# Altium PCB blackfin_pcb.PcbDoc (part 2 of 4)
Units mil, origin at the board's own origin, x right, y up, seen from the top; angles counter-clockwise.
Board outline 4330.71 x 5905.51 mil, 4 copper layers (Top Layer, GROUND, POWER, Bottom Layer), stack 59.76 mil thick; 381 components, 314 nets, 1218 pads, 647 vias.
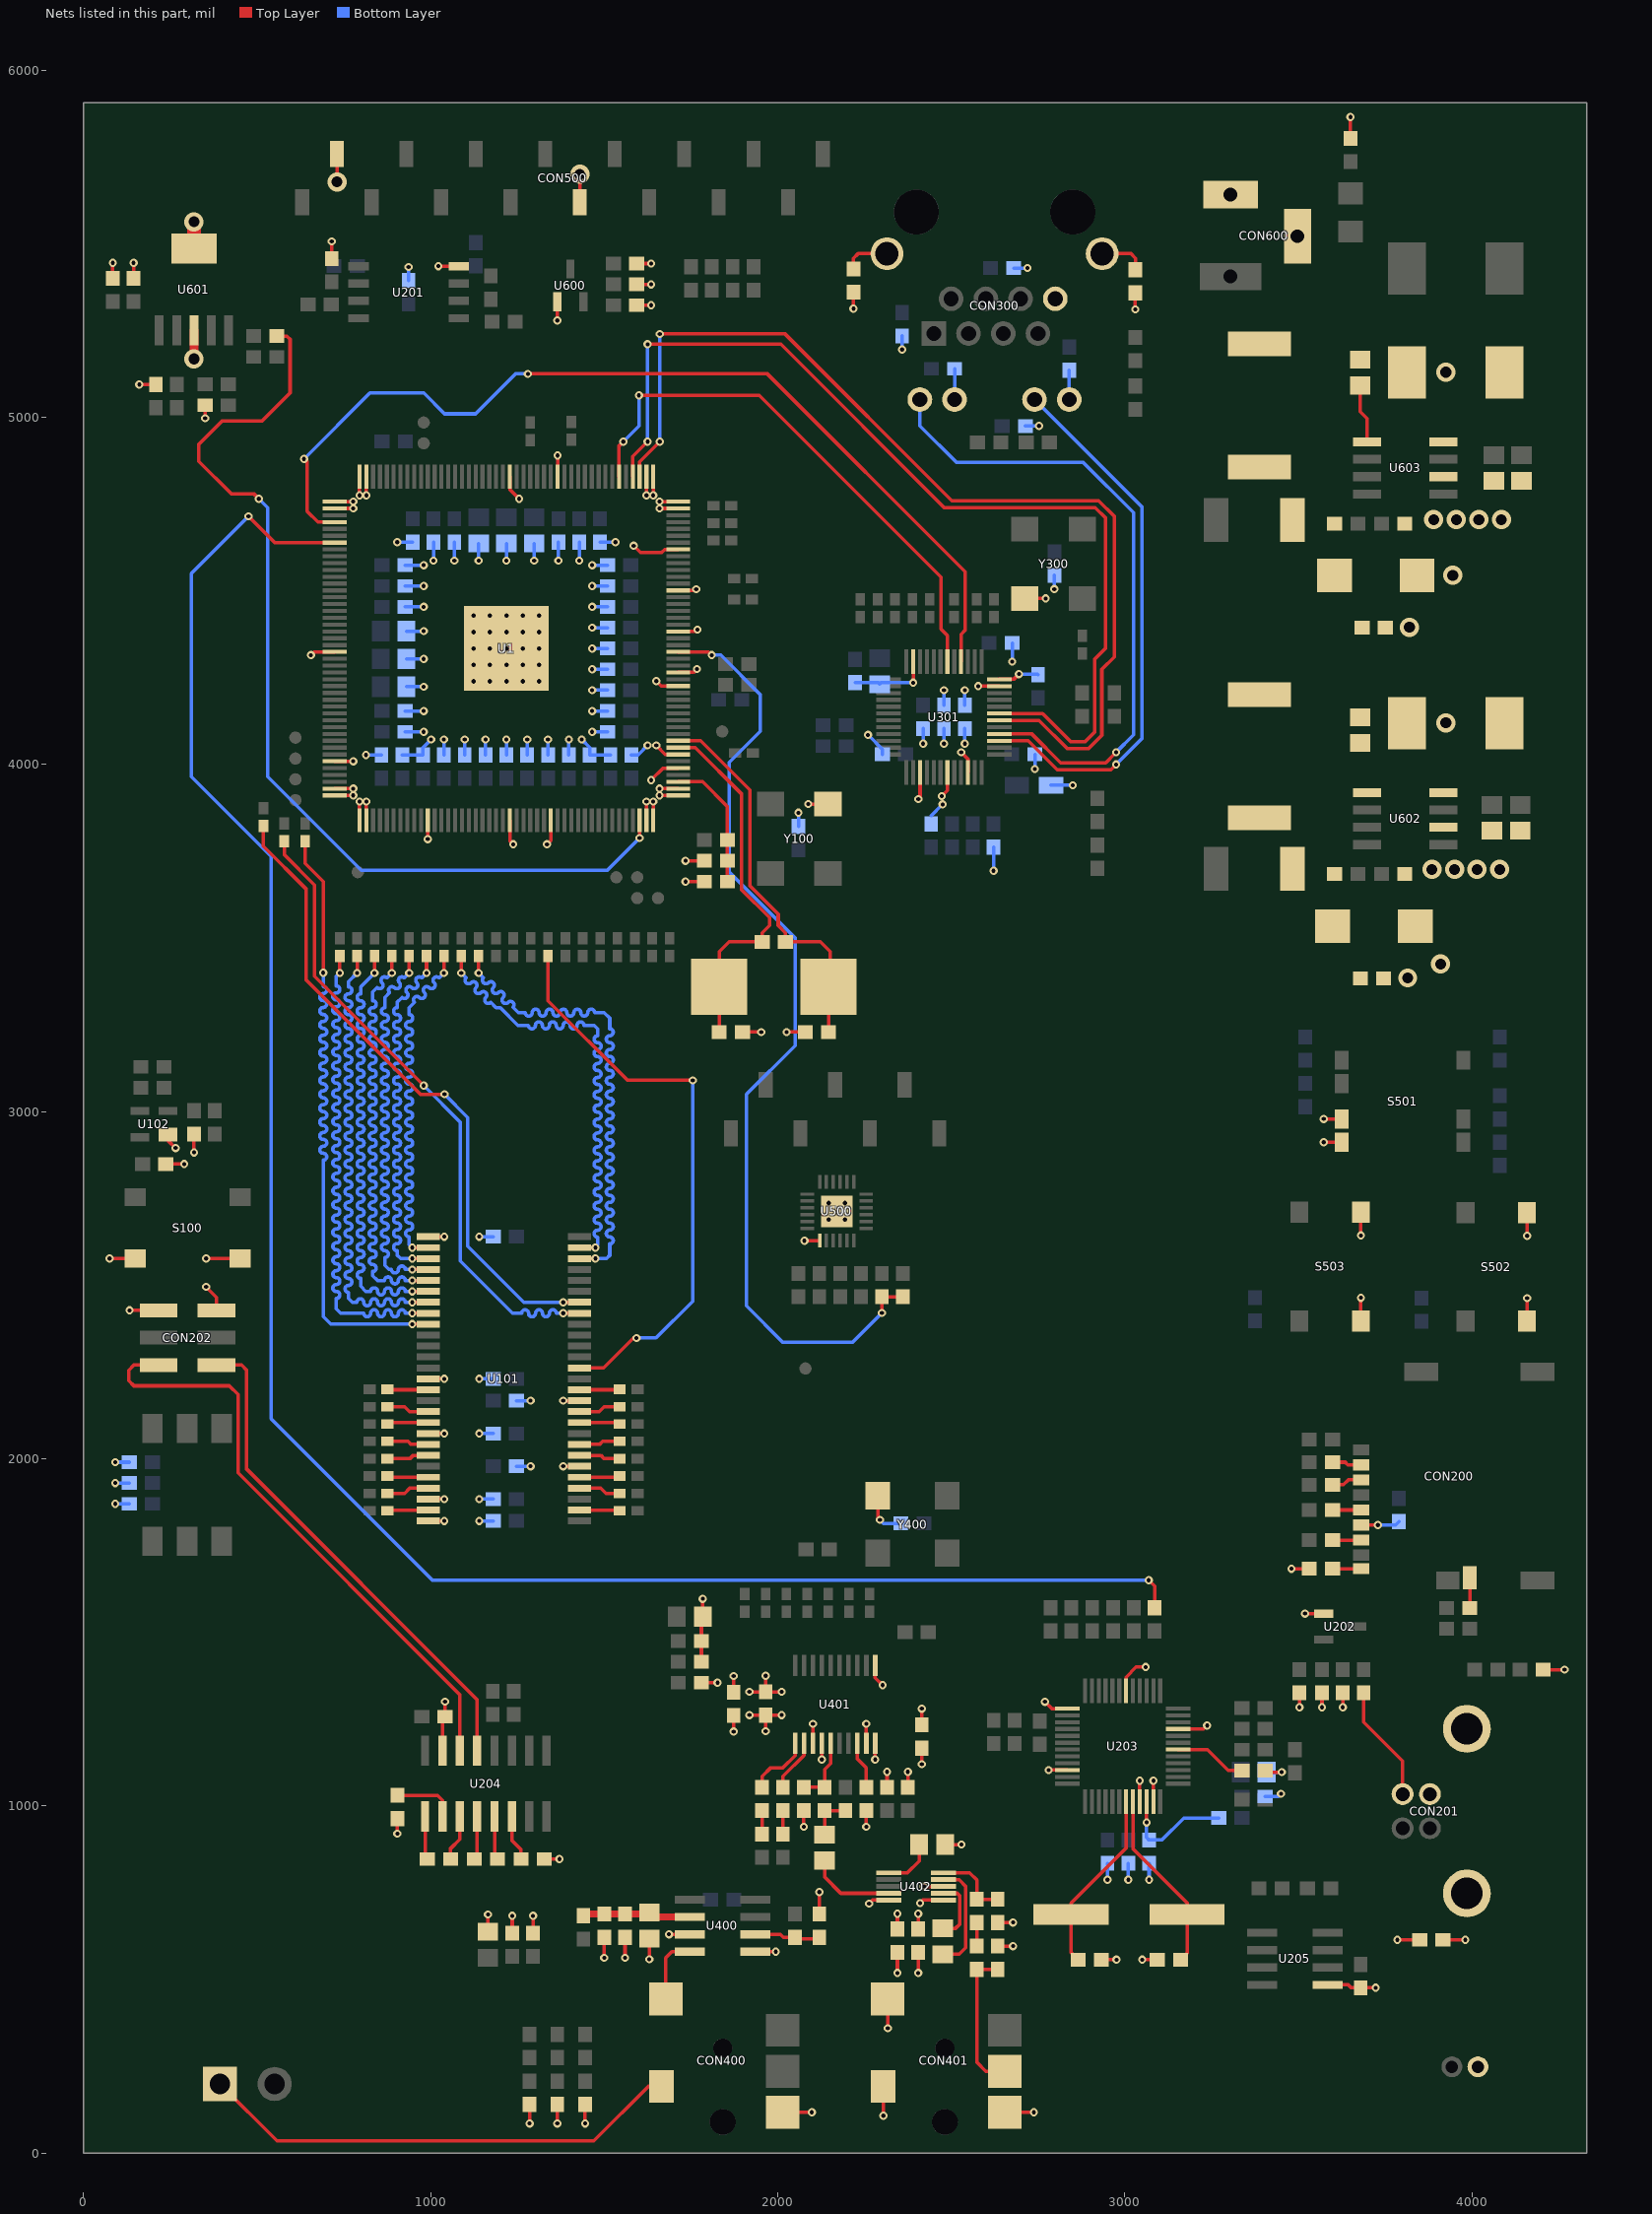
[diagram p4: the nets of this part, all layers, seen from the top]

## Via types
v1: diameter 23.62, hole 11.81, Top Layer to Bottom Layer, tented both sides, 566 vias
v2: diameter 55.12, hole 31.5, Top Layer to Bottom Layer, 36 vias
v3: diameter 25.98, hole 12.99, Top Layer to Bottom Layer, tented top, 29 vias
v4: diameter 157.48, hole 98.43, Top Layer to Bottom Layer, 8 vias
v5: diameter 55.12, hole 31.5, Top Layer to Bottom Layer, tented both sides, 4 vias
v6: diameter 137.8, hole 90.55, Top Layer to Bottom Layer, 4 vias

## Nets (pads, with @x,y where several pads share a name; then routed paths per layer and width w, separated by ;. In a path a pad name is that pad's centre, name@x,y a point inside that pad or via, vN(x,y) a via of type N, cw(c..) or ccw(c..) an arc to the next point about the centre after c; other vN are vias at no path point) (continued)
A3: R104.1 U101.25 | length 1792.1
  Top Layer w10: v1(1138.11,3399.33) R104.1@1138.11,3448.39 ; U101.25@1428.26,2576.61 v1(1474.44,2576.61)
  Bottom Layer w10: v1(1138.11,3399.33) 1152.25,3385.19 ccw(c1159.32,3378.12) 1166.39,3371.05 cw(c1173.47,3363.98) 1180.54,3356.9 ccw(c1187.61,3349.83) 1194.68,3342.76 cw(c1201.75,3335.69) 1208.82,3328.62 ccw(c1215.89,3321.55) 1222.96,3314.48 cw(c1230.03,3307.41) 1237.11,3300.34 1252.44,3285 1272.44,3285 ccw(c1282.44,3285) 1292.44,3285 cw(c1302.44,3285) 1312.44,3285 ccw(c1322.44,3285) 1332.44,3285 cw(c1342.44,3285) 1352.44,3285 ccw(c1362.44,3285) 1372.44,3285 cw(c1382.44,3285) 1392.44,3285 ccw(c1402.44,3285) 1412.44,3285 cw(c1422.44,3285) 1432.44,3285 ccw(c1442.44,3285) 1452.44,3285 cw(c1462.44,3285) 1472.44,3285 1500,3285 1516.02,3268.98 1516.02,3238.74 cw(c1516.02,3228.74) 1516.02,3218.74 ccw(c1516.02,3208.74) 1516.02,3198.74 cw(c1516.02,3188.74) 1516.02,3178.74 ccw(c1516.02,3168.74) 1516.02,3158.74 cw(c1516.02,3148.74) 1516.02,3138.74 ccw(c1516.02,3128.74) 1516.02,3118.74 cw(c1516.02,3108.74) 1516.02,3098.74 ccw(c1516.02,3088.74) 1516.02,3078.74 cw(c1516.02,3068.74) 1516.02,3058.74 ccw(c1516.02,3048.74) 1516.02,3038.74 cw(c1516.02,3028.74) 1516.02,3018.74 ccw(c1516.02,3008.74) 1516.02,2998.74 cw(c1516.02,2988.74) 1516.02,2978.74 ccw(c1516.02,2968.74) 1516.02,2958.74 cw(c1516.02,2948.74) 1516.02,2938.74 ccw(c1516.02,2928.74) 1516.02,2918.74 cw(c1516.02,2908.74) 1516.02,2898.74 ccw(c1516.02,2888.74) 1516.02,2878.74 cw(c1516.02,2868.74) 1516.02,2858.74 ccw(c1516.02,2848.74) 1516.02,2838.74 cw(c1516.02,2828.74) 1516.02,2818.74 ccw(c1516.02,2808.74) 1516.02,2798.74 cw(c1516.02,2788.74) 1516.02,2778.74 ccw(c1516.02,2768.74) 1516.02,2758.74 cw(c1516.02,2748.74) 1516.02,2738.74 ccw(c1516.02,2728.74) 1516.02,2718.74 cw(c1516.02,2708.74) 1516.02,2698.74 ccw(c1516.02,2688.74) 1516.02,2678.74 cw(c1516.02,2668.74) 1516.02,2658.74 ccw(c1516.02,2648.74) 1516.02,2638.74 cw(c1516.02,2628.74) 1516.02,2618.74 1516.02,2586.02 1506.61,2576.61 v1(1474.44,2576.61)
A4: R106.1 U101.26 | length 1667.3
  Top Layer w10: v1(1088.11,3399.33) R106.1@1088.11,3448.39 ; U101.26@1428.26,2608.11 v1(1474.44,2608.11)
  Bottom Layer w10: v1(1088.11,3399.33) 1102.25,3385.19 ccw(c1109.32,3378.12) 1116.39,3371.05 cw(c1123.47,3363.98) 1130.54,3356.9 ccw(c1137.61,3349.83) 1144.68,3342.76 cw(c1151.75,3335.69) 1158.82,3328.62 ccw(c1165.89,3321.55) 1172.96,3314.48 1188.22,3299.22 1200.78,3299.22 1251.69,3248.31 1281.69,3248.31 ccw(c1291.69,3248.31) 1301.69,3248.31 cw(c1311.69,3248.31) 1321.69,3248.31 ccw(c1331.69,3248.31) 1341.69,3248.31 cw(c1351.69,3248.31) 1361.69,3248.31 ccw(c1371.69,3248.31) 1381.69,3248.31 cw(c1391.69,3248.31) 1401.69,3248.31 ccw(c1411.69,3248.31) 1421.69,3248.31 cw(c1431.69,3248.31) 1441.69,3248.31 1471.1,3248.31 1481.02,3238.38 1481.02,3218.38 ccw(c1481.02,3208.38) 1481.02,3198.38 cw(c1481.02,3188.38) 1481.02,3178.38 ccw(c1481.02,3168.38) 1481.02,3158.38 cw(c1481.02,3148.38) 1481.02,3138.38 ccw(c1481.02,3128.38) 1481.02,3118.38 cw(c1481.02,3108.38) 1481.02,3098.38 ccw(c1481.02,3088.38) 1481.02,3078.38 cw(c1481.02,3068.38) 1481.02,3058.38 ccw(c1481.02,3048.38) 1481.02,3038.38 cw(c1481.02,3028.38) 1481.02,3018.38 ccw(c1481.02,3008.38) 1481.02,2998.38 cw(c1481.02,2988.38) 1481.02,2978.38 ccw(c1481.02,2968.38) 1481.02,2958.38 cw(c1481.02,2948.38) 1481.02,2938.38 ccw(c1481.02,2928.38) 1481.02,2918.38 cw(c1481.02,2908.38) 1481.02,2898.38 ccw(c1481.02,2888.38) 1481.02,2878.38 cw(c1481.02,2868.38) 1481.02,2858.38 ccw(c1481.02,2848.38) 1481.02,2838.38 cw(c1481.02,2828.38) 1481.02,2818.38 ccw(c1481.02,2808.38) 1481.02,2798.38 cw(c1481.02,2788.38) 1481.02,2778.38 ccw(c1481.02,2768.38) 1481.02,2758.38 cw(c1481.02,2748.38) 1481.02,2738.38 ccw(c1481.02,2728.38) 1481.02,2718.38 cw(c1481.02,2708.38) 1481.02,2698.38 ccw(c1481.02,2688.38) 1481.02,2678.38 cw(c1481.02,2668.38) 1481.02,2658.38 ccw(c1481.02,2648.38) 1481.02,2638.38 1481.02,2614.69 v1(1474.44,2608.11)
A5: R108.1 U101.29 | length 1354
  Top Layer w10: v1(947.04,2608.11) U101.29@993.22,2608.11 ; v1(1038.11,3399.33) R108.1@1038.11,3448.39
  Bottom Layer w10: v1(947.04,2608.11) 938.11,2617.04 938.11,2639.33 cw(c938.11,2649.33) 938.11,2659.33 ccw(c938.11,2669.33) 938.11,2679.33 cw(c938.11,2689.33) 938.11,2699.33 ccw(c938.11,2709.33) 938.11,2719.33 cw(c938.11,2729.33) 938.11,2739.33 ccw(c938.11,2749.33) 938.11,2759.33 cw(c938.11,2769.33) 938.11,2779.33 ccw(c938.11,2789.33) 938.11,2799.33 cw(c938.11,2809.33) 938.11,2819.33 ccw(c938.11,2829.33) 938.11,2839.33 cw(c938.11,2849.33) 938.11,2859.33 ccw(c938.11,2869.33) 938.11,2879.33 cw(c938.11,2889.33) 938.11,2899.33 ccw(c938.11,2909.33) 938.11,2919.33 cw(c938.11,2929.33) 938.11,2939.33 ccw(c938.11,2949.33) 938.11,2959.33 cw(c938.11,2969.33) 938.11,2979.33 ccw(c938.11,2989.33) 938.11,2999.33 cw(c938.11,3009.33) 938.11,3019.33 ccw(c938.11,3029.33) 938.11,3039.33 cw(c938.11,3049.33) 938.11,3059.33 ccw(c938.11,3069.33) 938.11,3079.33 cw(c938.11,3089.33) 938.11,3099.33 ccw(c938.11,3109.33) 938.11,3119.33 cw(c938.11,3129.33) 938.11,3139.33 ccw(c938.11,3149.33) 938.11,3159.33 cw(c938.11,3169.33) 938.11,3179.33 ccw(c938.11,3189.33) 938.11,3199.33 cw(c938.11,3209.33) 938.11,3219.33 ccw(c938.11,3229.33) 938.11,3239.33 cw(c938.11,3249.33) 938.11,3259.33 ccw(c938.11,3269.33) 938.11,3279.33 938.11,3299.33 953.26,3314.48 cw(c960.33,3321.55) 967.4,3328.62 ccw(c974.47,3335.69) 981.54,3342.76 cw(c988.61,3349.83) 995.68,3356.9 ccw(c1002.75,3363.98) 1009.83,3371.05 cw(c1016.9,3378.12) 1023.97,3385.19 v1(1038.11,3399.33)
A6: R110.1 U101.30 | length 1436.3
  Top Layer w10: v1(947.04,2576.61) U101.30@993.22,2576.61 ; v1(988.11,3399.33) R110.1@988.11,3448.39
  Bottom Layer w10: v1(947.04,2576.61) 913.39,2576.61 903.11,2586.89 903.11,2599.33 cw(c903.11,2609.33) 903.11,2619.33 ccw(c903.11,2629.33) 903.11,2639.33 cw(c903.11,2649.33) 903.11,2659.33 ccw(c903.11,2669.33) 903.11,2679.33 cw(c903.11,2689.33) 903.11,2699.33 ccw(c903.11,2709.33) 903.11,2719.33 cw(c903.11,2729.33) 903.11,2739.33 ccw(c903.11,2749.33) 903.11,2759.33 cw(c903.11,2769.33) 903.11,2779.33 ccw(c903.11,2789.33) 903.11,2799.33 cw(c903.11,2809.33) 903.11,2819.33 ccw(c903.11,2829.33) 903.11,2839.33 cw(c903.11,2849.33) 903.11,2859.33 ccw(c903.11,2869.33) 903.11,2879.33 cw(c903.11,2889.33) 903.11,2899.33 ccw(c903.11,2909.33) 903.11,2919.33 cw(c903.11,2929.33) 903.11,2939.33 ccw(c903.11,2949.33) 903.11,2959.33 cw(c903.11,2969.33) 903.11,2979.33 ccw(c903.11,2989.33) 903.11,2999.33 cw(c903.11,3009.33) 903.11,3019.33 ccw(c903.11,3029.33) 903.11,3039.33 cw(c903.11,3049.33) 903.11,3059.33 ccw(c903.11,3069.33) 903.11,3079.33 cw(c903.11,3089.33) 903.11,3099.33 ccw(c903.11,3109.33) 903.11,3119.33 cw(c903.11,3129.33) 903.11,3139.33 ccw(c903.11,3149.33) 903.11,3159.33 cw(c903.11,3169.33) 903.11,3179.33 ccw(c903.11,3189.33) 903.11,3199.33 cw(c903.11,3209.33) 903.11,3219.33 ccw(c903.11,3229.33) 903.11,3239.33 cw(c903.11,3249.33) 903.11,3259.33 ccw(c903.11,3269.33) 903.11,3279.33 cw(c903.11,3289.33) 903.11,3299.33 903.11,3314.33 917.4,3328.62 ccw(c924.47,3335.69) 931.54,3342.76 cw(c938.61,3349.83) 945.68,3356.9 ccw(c952.75,3363.98) 959.83,3371.05 cw(c966.9,3378.12) 973.97,3385.19 v1(988.11,3399.33)
A7: R112.1 U101.31 | length 1518.5
  Top Layer w10: v1(938.11,3399.33) R112.1@938.11,3448.39 ; v1(947.04,2545.12) U101.31@993.22,2545.12
  Bottom Layer w10: v1(938.11,3399.33) 923.97,3385.19 ccw(c916.9,3378.12) 909.83,3371.05 cw(c902.75,3363.98) 895.68,3356.9 ccw(c888.61,3349.83) 881.54,3342.76 868.11,3329.33 868.11,3299.33 ccw(c868.11,3289.33) 868.11,3279.33 cw(c868.11,3269.33) 868.11,3259.33 ccw(c868.11,3249.33) 868.11,3239.33 cw(c868.11,3229.33) 868.11,3219.33 ccw(c868.11,3209.33) 868.11,3199.33 cw(c868.11,3189.33) 868.11,3179.33 ccw(c868.11,3169.33) 868.11,3159.33 cw(c868.11,3149.33) 868.11,3139.33 ccw(c868.11,3129.33) 868.11,3119.33 cw(c868.11,3109.33) 868.11,3099.33 ccw(c868.11,3089.33) 868.11,3079.33 cw(c868.11,3069.33) 868.11,3059.33 ccw(c868.11,3049.33) 868.11,3039.33 cw(c868.11,3029.33) 868.11,3019.33 ccw(c868.11,3009.33) 868.11,2999.33 cw(c868.11,2989.33) 868.11,2979.33 ccw(c868.11,2969.33) 868.11,2959.33 cw(c868.11,2949.33) 868.11,2939.33 ccw(c868.11,2929.33) 868.11,2919.33 cw(c868.11,2909.33) 868.11,2899.33 ccw(c868.11,2889.33) 868.11,2879.33 cw(c868.11,2869.33) 868.11,2859.33 ccw(c868.11,2849.33) 868.11,2839.33 cw(c868.11,2829.33) 868.11,2819.33 ccw(c868.11,2809.33) 868.11,2799.33 cw(c868.11,2789.33) 868.11,2779.33 ccw(c868.11,2769.33) 868.11,2759.33 cw(c868.11,2749.33) 868.11,2739.33 ccw(c868.11,2729.33) 868.11,2719.33 cw(c868.11,2709.33) 868.11,2699.33 ccw(c868.11,2689.33) 868.11,2679.33 cw(c868.11,2669.33) 868.11,2659.33 ccw(c868.11,2649.33) 868.11,2639.33 cw(c868.11,2629.33) 868.11,2619.33 ccw(c868.11,2609.33) 868.11,2599.33 cw(c868.11,2589.33) 868.11,2579.33 868.11,2556.89 879.88,2545.12 887.04,2545.12 ccw(c897.04,2545.12) 907.04,2545.12 cw(c917.04,2545.12) 927.04,2545.12 v1(947.04,2545.12)
A8: R114.1 U101.32 | length 1612.2
  Top Layer w10: v1(888.11,3399.33) R114.1@888.11,3448.39 ; v1(947.04,2513.62) U101.32@993.22,2513.62
  Bottom Layer w10: v1(888.11,3399.33) 873.97,3385.19 ccw(c866.9,3378.12) 859.83,3371.05 cw(c852.75,3363.98) 845.68,3356.9 833.11,3344.33 833.11,3319.33 cw(c833.11,3309.33) 833.11,3299.33 ccw(c833.11,3289.33) 833.11,3279.33 cw(c833.11,3269.33) 833.11,3259.33 ccw(c833.11,3249.33) 833.11,3239.33 cw(c833.11,3229.33) 833.11,3219.33 ccw(c833.11,3209.33) 833.11,3199.33 cw(c833.11,3189.33) 833.11,3179.33 ccw(c833.11,3169.33) 833.11,3159.33 cw(c833.11,3149.33) 833.11,3139.33 ccw(c833.11,3129.33) 833.11,3119.33 cw(c833.11,3109.33) 833.11,3099.33 ccw(c833.11,3089.33) 833.11,3079.33 cw(c833.11,3069.33) 833.11,3059.33 ccw(c833.11,3049.33) 833.11,3039.33 cw(c833.11,3029.33) 833.11,3019.33 ccw(c833.11,3009.33) 833.11,2999.33 cw(c833.11,2989.33) 833.11,2979.33 ccw(c833.11,2969.33) 833.11,2959.33 cw(c833.11,2949.33) 833.11,2939.33 ccw(c833.11,2929.33) 833.11,2919.33 cw(c833.11,2909.33) 833.11,2899.33 ccw(c833.11,2889.33) 833.11,2879.33 cw(c833.11,2869.33) 833.11,2859.33 ccw(c833.11,2849.33) 833.11,2839.33 cw(c833.11,2829.33) 833.11,2819.33 ccw(c833.11,2809.33) 833.11,2799.33 cw(c833.11,2789.33) 833.11,2779.33 ccw(c833.11,2769.33) 833.11,2759.33 cw(c833.11,2749.33) 833.11,2739.33 ccw(c833.11,2729.33) 833.11,2719.33 cw(c833.11,2709.33) 833.11,2699.33 ccw(c833.11,2689.33) 833.11,2679.33 cw(c833.11,2669.33) 833.11,2659.33 ccw(c833.11,2649.33) 833.11,2639.33 cw(c833.11,2629.33) 833.11,2619.33 ccw(c833.11,2609.33) 833.11,2599.33 cw(c833.11,2589.33) 833.11,2579.33 ccw(c833.11,2569.33) 833.11,2559.33 cw(c833.11,2549.33) 833.11,2539.33 833.11,2526.89 846.38,2513.62 867.04,2513.62 cw(c877.04,2513.62) 887.04,2513.62 ccw(c897.04,2513.62) 907.04,2513.62 cw(c917.04,2513.62) 927.04,2513.62 v1(947.04,2513.62)
A9: R116.1 U101.33 | length 1694.4
  Top Layer w10: v1(838.11,3399.33) R116.1@838.11,3448.39 ; v1(947.04,2482.13) U101.33@993.22,2482.13
  Bottom Layer w10: v1(838.11,3399.33) 798.11,3359.33 798.11,3339.33 ccw(c798.11,3329.33) 798.11,3319.33 cw(c798.11,3309.33) 798.11,3299.33 ccw(c798.11,3289.33) 798.11,3279.33 cw(c798.11,3269.33) 798.11,3259.33 ccw(c798.11,3249.33) 798.11,3239.33 cw(c798.11,3229.33) 798.11,3219.33 ccw(c798.11,3209.33) 798.11,3199.33 cw(c798.11,3189.33) 798.11,3179.33 ccw(c798.11,3169.33) 798.11,3159.33 cw(c798.11,3149.33) 798.11,3139.33 ccw(c798.11,3129.33) 798.11,3119.33 cw(c798.11,3109.33) 798.11,3099.33 ccw(c798.11,3089.33) 798.11,3079.33 cw(c798.11,3069.33) 798.11,3059.33 ccw(c798.11,3049.33) 798.11,3039.33 cw(c798.11,3029.33) 798.11,3019.33 ccw(c798.11,3009.33) 798.11,2999.33 cw(c798.11,2989.33) 798.11,2979.33 ccw(c798.11,2969.33) 798.11,2959.33 cw(c798.11,2949.33) 798.11,2939.33 ccw(c798.11,2929.33) 798.11,2919.33 cw(c798.11,2909.33) 798.11,2899.33 ccw(c798.11,2889.33) 798.11,2879.33 cw(c798.11,2869.33) 798.11,2859.33 ccw(c798.11,2849.33) 798.11,2839.33 cw(c798.11,2829.33) 798.11,2819.33 ccw(c798.11,2809.33) 798.11,2799.33 cw(c798.11,2789.33) 798.11,2779.33 ccw(c798.11,2769.33) 798.11,2759.33 cw(c798.11,2749.33) 798.11,2739.33 ccw(c798.11,2729.33) 798.11,2719.33 cw(c798.11,2709.33) 798.11,2699.33 ccw(c798.11,2689.33) 798.11,2679.33 cw(c798.11,2669.33) 798.11,2659.33 ccw(c798.11,2649.33) 798.11,2639.33 cw(c798.11,2629.33) 798.11,2619.33 ccw(c798.11,2609.33) 798.11,2599.33 cw(c798.11,2589.33) 798.11,2579.33 ccw(c798.11,2569.33) 798.11,2559.33 cw(c798.11,2549.33) 798.11,2539.33 ccw(c798.11,2529.33) 798.11,2519.33 798.11,2496.89 812.87,2482.13 827.04,2482.13 cw(c837.04,2482.13) 847.04,2482.13 ccw(c857.04,2482.13) 867.04,2482.13 cw(c877.04,2482.13) 887.04,2482.13 ccw(c897.04,2482.13) 907.04,2482.13 cw(c917.04,2482.13) 927.04,2482.13 v1(947.04,2482.13)
A10: R118.1 U101.34 | length 1813.8
  Top Layer w10: v1(788.11,3399.33) R118.1@788.11,3448.39 ; v1(947.04,2450.63) U101.34@993.22,2450.63
  Bottom Layer w10: v1(788.11,3399.33) 763.11,3374.33 763.11,3359.33 cw(c763.11,3349.33) 763.11,3339.33 ccw(c763.11,3329.33) 763.11,3319.33 cw(c763.11,3309.33) 763.11,3299.33 ccw(c763.11,3289.33) 763.11,3279.33 cw(c763.11,3269.33) 763.11,3259.33 ccw(c763.11,3249.33) 763.11,3239.33 cw(c763.11,3229.33) 763.11,3219.33 ccw(c763.11,3209.33) 763.11,3199.33 cw(c763.11,3189.33) 763.11,3179.33 ccw(c763.11,3169.33) 763.11,3159.33 cw(c763.11,3149.33) 763.11,3139.33 ccw(c763.11,3129.33) 763.11,3119.33 cw(c763.11,3109.33) 763.11,3099.33 ccw(c763.11,3089.33) 763.11,3079.33 cw(c763.11,3069.33) 763.11,3059.33 ccw(c763.11,3049.33) 763.11,3039.33 cw(c763.11,3029.33) 763.11,3019.33 ccw(c763.11,3009.33) 763.11,2999.33 cw(c763.11,2989.33) 763.11,2979.33 ccw(c763.11,2969.33) 763.11,2959.33 cw(c763.11,2949.33) 763.11,2939.33 ccw(c763.11,2929.33) 763.11,2919.33 cw(c763.11,2909.33) 763.11,2899.33 ccw(c763.11,2889.33) 763.11,2879.33 cw(c763.11,2869.33) 763.11,2859.33 ccw(c763.11,2849.33) 763.11,2839.33 cw(c763.11,2829.33) 763.11,2819.33 ccw(c763.11,2809.33) 763.11,2799.33 cw(c763.11,2789.33) 763.11,2779.33 ccw(c763.11,2769.33) 763.11,2759.33 cw(c763.11,2749.33) 763.11,2739.33 ccw(c763.11,2729.33) 763.11,2719.33 cw(c763.11,2709.33) 763.11,2699.33 ccw(c763.11,2689.33) 763.11,2679.33 cw(c763.11,2669.33) 763.11,2659.33 ccw(c763.11,2649.33) 763.11,2639.33 cw(c763.11,2629.33) 763.11,2619.33 ccw(c763.11,2609.33) 763.11,2599.33 cw(c763.11,2589.33) 763.11,2579.33 ccw(c763.11,2569.33) 763.11,2559.33 cw(c763.11,2549.33) 763.11,2539.33 ccw(c763.11,2529.33) 763.11,2519.33 cw(c763.11,2509.33) 763.11,2499.33 ccw(c763.11,2489.33) 763.11,2479.33 763.11,2461.89 774.37,2450.63 787.04,2450.63 cw(c797.04,2450.63) 807.04,2450.63 ccw(c817.04,2450.63) 827.04,2450.63 cw(c837.04,2450.63) 847.04,2450.63 ccw(c857.04,2450.63) 867.04,2450.63 cw(c877.04,2450.63) 887.04,2450.63 ccw(c897.04,2450.63) 907.04,2450.63 cw(c917.04,2450.63) 927.04,2450.63 v1(947.04,2450.63)
A12: R122.1 U101.35 | length 1873.2
  Top Layer w10: v1(738.11,3399.33) R122.1@738.11,3448.39 ; v1(947.04,2419.13) U101.35@993.22,2419.13
  Bottom Layer w10: v1(738.11,3399.33) 728.11,3389.33 728.11,3361.89 cw(c728.11,3351.89) 728.11,3341.89 ccw(c728.11,3331.89) 728.11,3321.89 cw(c728.11,3311.89) 728.11,3301.89 ccw(c728.11,3291.89) 728.11,3281.89 cw(c728.11,3271.89) 728.11,3261.89 ccw(c728.11,3251.89) 728.11,3241.89 cw(c728.11,3231.89) 728.11,3221.89 ccw(c728.11,3211.89) 728.11,3201.89 cw(c728.11,3191.89) 728.11,3181.89 ccw(c728.11,3171.89) 728.11,3161.89 cw(c728.11,3151.89) 728.11,3141.89 ccw(c728.11,3131.89) 728.11,3121.89 cw(c728.11,3111.89) 728.11,3101.89 ccw(c728.11,3091.89) 728.11,3081.89 cw(c728.11,3071.89) 728.11,3061.89 ccw(c728.11,3051.89) 728.11,3041.89 cw(c728.11,3031.89) 728.11,3021.89 ccw(c728.11,3011.89) 728.11,3001.89 cw(c728.11,2991.89) 728.11,2981.89 ccw(c728.11,2971.89) 728.11,2961.89 cw(c728.11,2951.89) 728.11,2941.89 ccw(c728.11,2931.89) 728.11,2921.89 cw(c728.11,2911.89) 728.11,2901.89 ccw(c728.11,2891.89) 728.11,2881.89 cw(c728.11,2871.89) 728.11,2861.89 ccw(c728.11,2851.89) 728.11,2841.89 cw(c728.11,2831.89) 728.11,2821.89 ccw(c728.11,2811.89) 728.11,2801.89 cw(c728.11,2791.89) 728.11,2781.89 ccw(c728.11,2771.89) 728.11,2761.89 cw(c728.11,2751.89) 728.11,2741.89 ccw(c728.11,2731.89) 728.11,2721.89 cw(c728.11,2711.89) 728.11,2701.89 ccw(c728.11,2691.89) 728.11,2681.89 cw(c728.11,2671.89) 728.11,2661.89 ccw(c728.11,2651.89) 728.11,2641.89 cw(c728.11,2631.89) 728.11,2621.89 ccw(c728.11,2611.89) 728.11,2601.89 cw(c728.11,2591.89) 728.11,2581.89 ccw(c728.11,2571.89) 728.11,2561.89 cw(c728.11,2551.89) 728.11,2541.89 ccw(c728.11,2531.89) 728.11,2521.89 cw(c728.11,2511.89) 728.11,2501.89 ccw(c728.11,2491.89) 728.11,2481.89 cw(c728.11,2471.89) 728.11,2461.89 728.11,2431.89 740.87,2419.13 767.04,2419.13 807.04,2419.13 ccw(c817.04,2419.13) 827.04,2419.13 cw(c837.04,2419.13) 847.04,2419.13 ccw(c857.04,2419.13) 867.04,2419.13 cw(c877.04,2419.13) 887.04,2419.13 ccw(c897.04,2419.13) 907.04,2419.13 cw(c917.04,2419.13) 927.04,2419.13 v1(947.04,2419.13)
A13: R124.1 U101.36 | length 1987.8
  Top Layer w10: R124.1@638.11,3778.39 638.11,3715.33 690.51,3662.93 v1(690.51,3399.93) ; v1(947.04,2387.64) U101.36@993.22,2387.64
  Bottom Layer w10: v1(690.51,3399.93) 690.51,3359.93 cw(c690.51,3349.93) 690.51,3339.93 ccw(c690.51,3329.93) 690.51,3319.93 cw(c690.51,3309.93) 690.51,3299.93 ccw(c690.51,3289.93) 690.51,3279.93 cw(c690.51,3269.93) 690.51,3259.93 ccw(c690.51,3249.93) 690.51,3239.93 cw(c690.51,3229.93) 690.51,3219.93 ccw(c690.51,3209.93) 690.51,3199.93 cw(c690.51,3189.93) 690.51,3179.93 ccw(c690.51,3169.93) 690.51,3159.93 cw(c690.51,3149.93) 690.51,3139.93 ccw(c690.51,3129.93) 690.51,3119.93 cw(c690.51,3109.93) 690.51,3099.93 ccw(c690.51,3089.93) 690.51,3079.93 cw(c690.51,3069.93) 690.51,3059.93 ccw(c690.51,3049.93) 690.51,3039.93 cw(c690.51,3029.93) 690.51,3019.93 ccw(c690.51,3009.93) 690.51,2999.93 cw(c690.51,2989.93) 690.51,2979.93 ccw(c690.51,2969.93) 690.51,2959.93 cw(c690.51,2949.93) 690.51,2939.93 ccw(c690.51,2929.93) 690.51,2919.93 cw(c690.51,2909.93) 690.51,2899.93 ccw(c690.51,2889.93) 690.51,2879.93 cw(c690.51,2869.93) 690.51,2859.93 690.51,2409.49 712.36,2387.64 v1(947.04,2387.64)
A18: R133.1 U101.20 | length 1881
  Top Layer w10: R133.1@578.11,3778.39 578.11,3740.33 665.51,3652.93 665.51,3390 v1@980.26,3075.26 ; v1(1382.08,2419.13) U101.20@1428.26,2419.13
  Bottom Layer w10: v1(980,3075) 1085.64,2969.36 1085.64,2569.36 1235.87,2419.13 1262.08,2419.13 cw(c1272.08,2419.13) 1282.08,2419.13 ccw(c1292.08,2419.13) 1302.08,2419.13 cw(c1312.08,2419.13) 1322.08,2419.13 ccw(c1332.08,2419.13) 1342.08,2419.13 cw(c1352.08,2419.13) 1362.08,2419.13 v1(1382.08,2419.13)
A19: R134.1 U101.21 | length 1884.1
  Top Layer w10: R134.1@518.11,3823.39 518.11,3764.33 640.51,3641.93 640.51,3379.65 970.16,3050 v1(1040,3050) ; v1(1382.08,2450.63) U101.21@1428.26,2450.63
  Bottom Layer w10: v1(1040,3050) 1106.85,2983.15 1106.85,2612.52 1268.74,2450.63 v1(1382.08,2450.63)
AVCC3V3_CODEC: C409.2 C410.2 C415.2 C416.2 L401.2 R414.2 R415.2 R416.1 U401.3 U401.9 U402.3 U402.10 | length 592.1
  Top Layer w10: L401.2@1780,1355 v1(1826.54,1355) ; C410.2@1872.81,1327.46 v1(1872.81,1374) ; U401.3@2101.38,1180 v1(2101.38,1236.54) ; U401.9@2254.92,1180 v1(2254.92,1236.54) ; v1(2263.15,718.52) 2273.15,728.52 U402.10@2319.69,728.52 ; R414.2@2315,1053.46 v1(2315,1097.91) ; C415.2@2344.81,645 v1(2344.81,689.45) ; R415.2@2375,1053.46 v1(2375,1097.91) ; C416.2@2404.81,645 v1(2404.81,689.45) ; C409.2@2415,1233.46 v1(2415,1280) ; v1(2420.63,767.89) U402.3@2477.17,767.89 ; R416.1@2633.52,596.08 v1(2677.97,596.08)
AVCC3V3_PHY: C303.2 C304.2 L300.2 U301.22 | length 195.8
  Top Layer w10: v1(2528.62,4035) 2547.87,4015.75 U301.22@2547.87,3977.44
  Bottom Layer w10: v1(2418.98,4060) L300.2@2418.98,4103.43 ; v1(2478.98,4060) C303.2@2478.98,4103.43 ; v1(2538.98,4060) C304.2@2538.98,4103.43
AVCC5V: C403.2 C404.2 C405.2 L400.2 U400.6 | length 309.3
  Top Layer w20: L400.2@1440,683.46 1445,688.46 C403.2@1500,688.46 C404.2@1560,688.46 C405.2@1626.06,688.46 ; C405.2@1630,692.4 1642.4,680 U400.6@1746.02,680
AVCC5V_USB: C208.2 R216.2 U203.46 | length 341
  Top Layer w10: v1(3062.68,952.32) U203.46@3062.68,1012.66
  Bottom Layer w10: v1(3062.68,952.32) 3062.68,908.92 C208.2@3070.02,901.57 3106.57,901.57 3170,965 R216.2@3270.63,965
COL: U1.6 U301.42 | length 1596.2
  Top Layer w10: U1.6@1542.91,4829.06 1542.91,4917.91 v1(1555,4930) ; v1(1600,5063.33) 1946.67,5063.33 2470,4540 2470,4390 2488.82,4371.18 U301.42@2488.82,4296.34
  Bottom Layer w10: v1(1555,4930) 1600,4975 v1(1600,5063.33)
CRS: U1.48 U301.40 | length 2802
  Top Layer w10: v1@636.64,4880.3 643.8,4873.13 643.8,4729.18 674.84,4698.15 U1.48@723.03,4698.15 ; v1(1280,5125) 1970.27,5125 2540,4555.27 2540,4386.81 2528.19,4375 U301.40@2528.19,4296.34
  Bottom Layer w10: v1(635.15,4880.15) 825,5070 980.36,5070 1040.36,5010 1129.64,5010 1244.64,5125 v1(1280,5125)
D0: R101.2 U101.2 | length 117.1
  Top Layer w10: U101.2@1428.26,1852.2 1542.2,1852.2 R101.2@1544.41,1850
D1: R103.2 U101.4 | length 122.4
  Top Layer w10: U101.4@1428.26,1915.2 1489.8,1915.2 1505,1900 R103.2@1544.41,1900
D2: R105.2 U101.5 | length 117.5
  Top Layer w10: U101.5@1428.26,1946.69 1541.1,1946.69 R105.2@1544.41,1950
D3: R107.2 U101.7 | length 120.2
  Top Layer w10: U101.7@1428.26,2009.68 1490.32,2009.68 1500,2000 R107.2@1544.41,2000
D4: R109.2 U101.8 | length 119.8
  Top Layer w10: U101.8@1428.26,2041.18 1486.18,2041.18 1495,2050 R109.2@1544.41,2050
D5: R111.2 U101.10 | length 117.9
  Top Layer w10: U101.10@1428.26,2104.17 1540.24,2104.17 R111.2@1544.41,2100
D6: R113.2 U101.11 | length 122.1
  Top Layer w10: U101.11@1428.26,2135.67 1485.67,2135.67 1500,2150 R113.2@1544.41,2150
D7: R115.2 U101.13 | length 116.7
  Top Layer w10: U101.13@1428.26,2198.66 1543.07,2198.66 R115.2@1544.41,2200
D8: R117.2 U101.42 | length 118.2
  Top Layer w10: R117.2@875.59,2200 876.93,2198.66 U101.42@993.22,2198.66
D9: R119.2 U101.44 | length 123.6
  Top Layer w10: R119.2@875.59,2150 925,2150 939.33,2135.67 U101.44@993.22,2135.67
D10: R121.2 U101.45 | length 119.4
  Top Layer w10: R121.2@875.59,2100 879.76,2104.17 U101.45@993.22,2104.17
D11: R123.2 U101.47 | length 121.3
  Top Layer w10: R123.2@875.59,2050 935,2050 943.82,2041.18 U101.47@993.22,2041.18
D12: R125.2 U101.48 | length 121.6
  Top Layer w10: R125.2@875.59,2000 940,2000 949.68,2009.68 U101.48@993.22,2009.68
D13: R127.2 U101.50 | length 119
  Top Layer w10: R127.2@875.59,1950 878.9,1946.69 U101.50@993.22,1946.69
D14: R129.2 U101.51 | length 123.9
  Top Layer w10: R129.2@875.59,1900 924.57,1900 939.76,1915.2 U101.51@993.22,1915.2
D15: R131.2 U101.53 | length 118.5
  Top Layer w10: R131.2@875.59,1850 877.8,1852.2 U101.53@993.22,1852.2
E\M\U\: R227.2 U1.51 | length 5851.2
  Top Layer w10: v1(475,4715) 550.91,4639.09 U1.51@723.03,4639.09 ; v1(3068.98,1650) 3086.02,1632.95 R227.2@3086.02,1570.57
  Bottom Layer w10: v1(475,4715) 310,4550 310,3965.29 540,3735.29 540,2115 1005,1650 v1(3068.98,1650)
EARTH: C403.1 C404.1 C405.1 C409.1 C410.1 C413.1 C415.1 C416.1 C417.1 C421.1 C422.2 C423.1 CON400.1 CON401.1 CON401.2 CON401.4 L402.2 M400.2 U400.1 U400.7 U401.4 U401.10 U402.1 | length 1393.9
  Top Layer w10: v1(1500,562.09) C403.1@1500,621.54 ; v1(1560,562.09) C404.1@1560,621.54 ; v1(1630,558.15) C405.1@1630,617.6 ; v1(1686.57,630) U400.7@1746.02,630 ; v1(1872.81,1214) C410.1@1872.81,1260.54 ; v1(1918.46,1261.54) L402.2@1965,1261.54 ; U400.1@1935,580 v1(1994.45,580) ; v1(1965,1215) L402.2@1965,1261.54 ; v1(2011.54,1261.54) L402.2@1965,1261.54 ; CON400.1@2013.78,117.2 v1(2098.23,117.2) ; v1(2075,940) C423.1@2075,986.54 ; C413.1@2120,692.4 v1(2120,751.85) ; v1(2126.97,1133.46) U401.4@2126.97,1180 ; v1(2255,940) C417.1@2255,986.54 ; v1(2280.51,1133.46) U401.10@2280.51,1180 ; v1(2304.13,107.56) CON401.4@2304.13,192.01 ; v1(2316.93,359.53) CON401.2@2316.93,443.98 ; v1(2344.81,518.62) C415.1@2344.81,578.07 ; v1(2404.81,518.62) C416.1@2404.81,578.07 ; v1(2410,720) 2418.52,728.52 U402.1@2477.17,728.52 ; v1(2415,1120) C409.1@2415,1166.54 ; C422.2@2482.57,888.52 v1(2529.1,888.52) ; C421.1@2633.52,664.15 v1(2677.97,664.15) ; CON401.1@2653.54,117.2 v1(2737.99,117.2)
EARTH_ETH: CON300.13 CON300.14 L301.2 L302.2 | length 267.3
  Top Layer w10: L302.2@2218.11,5427.44 2218.11,5458.11 2231.35,5471.35 CON300.13@2314.61,5471.35 ; CON300.14@2934.69,5471.35 3017.94,5471.35 3031.18,5458.11 L301.2@3031.18,5425.44
EARTH_USB: CON201.5 L201.1 | length 64.4
  Top Layer w10: L201.1@3916.57,613.98 v1(3981.02,613.98)
EXT_WAKE: R603.1 U1.130 | length 2871.6
  Top Layer w10: v1(505,4765) 490,4780 425,4780 332.19,4872.81 332.19,4922.19 400,4990 515,4990 595,5070 595,5225 586.02,5233.98 R603.1@556.57,5233.98 ; v1(1601.97,3788.03) U1.130@1601.97,3838.9
  Bottom Layer w10: v1(505,4765) 530,4740 530,3965 800,3695 1508.94,3695 v1(1601.97,3788.03)
GND: C100.1 C101.1 C102.1 C103.1 C104.1 C105.1 C106.1 C107.1 C108.1 C109.1 C110.1 C111.1 C200.1 C201.1 C202.1 C203.1 C204.1 C205.1 C206.1 C207.1 C208.1 C209.2 C210.1 C211.2 C212.2 C215.1 C216.1 C217.1 C218.1 C300.1 C301.1 C302.1 C303.1 C304.1 C305.2 C306.1 C307.1 C308.1 C309.1 C310.1 C311.2 C312.2 C313.1 C400.1 C401.1 C402.1 C406.1 C407.1 C408.1 C414.1 C600.1 C601.1 C602.1 C603.1 C604.1 C605.1 C606.1 C607.1 C608.1 C609.1 C610.1 C611.1 C612.1 C613.1 C614.1 C615.1 C616.1 C617.1 C618.1 C619.1 C620.1 C621.1 C622.1 C623.1 C624.1 C625.1 C626.1 C627.1 C628.1 C629.1 C630.1 C631.1 C632.1 C633.1 C634.1 C635.1 C636.1 C637.1 C638.1 C639.1 C640.1 C641.1 C643.1 C644.1 C645.2 C646.1 C648.1 C649.1 C650.2 C651.1 C652.1 C653.1 C654.1 CON200.6 CON201.4 CON202.5 CON202.6 CON300.8 CON500.2 CON500.9 CON600.2 CON600.3 D200.2 D500.2 D501.2 D502.2 D600.1 D602.1 D603.2 L201.2 L301.1 L302.1 L402.1 R148.1 R151.1 R208.1 R209.1 R210.1 R219.1 R243.1 R306.1 R604.1 R607.1 R611.1 S100.2 S501.1 S501.2 S502.1 S503.1 U1.1 U1.2 U1.15 U1.22 U1.43 U1.44 U1.45 U1.46 U1.67 U1.83 U1.87 U1.88 U1.89 U1.90 U1.99 U1.111 U1.117 U1.131 U1.132 U1.133 U1.134 U1.137 U1.139 U1.149 U1.151 U1.157 U1.163 U1.169 U1.175 U1.176 U1.177 U101.6 U101.12 U101.28 U101.41 U101.46 U101.52 U101.54 U102.1 U201.4 U202.1 U203.9 U203.18 U203.25 U203.34 U203.45 U203.47 U204.15 U205.5 U301.15 U301.19 U301.35 U301.36 U301.47 U401.11 U500.0 U500.19 U600.1 U601.3 U601.6 U602.6 U603.6 Y100.2 Y300.2 Y400.2 | length 10414.2
  Top Layer w10: v1(74.91,2576.81) S100.2@148.11,2576.81 ; C613.1@83.98,5400.35 v1(83.98,5444.8) ; v1(132.48,2427.48) CON202.6@215.68,2427.48 ; C612.1@143.98,5400.35 v1(143.98,5444.8) ; v1(160.35,5094.65) C614.1@208.11,5094.65 ; C104.1@236.57,2848.98 v1(289.77,2848.98) ; U102.1@243.11,2933.98 243.11,2916.89 v1(265,2895) ; v1(318.11,2882.31) R151.1@318.11,2935.51 ; v1(350,4997.24) R604.1@350,5035 ; v1(353.06,2495) 383,2465.06 CON202.5@383,2427.48 ; v1(353.06,2576.81) S100.2@451.26,2576.81 ; v1(655,4315) 664.13,4324.13 U1.67@723.03,4324.13 ; R219.1@715,5457.2 v1(715,5506.65) ; U1.88@723.03,3910.75 v1(777.01,3910.75) ; U1.87@723.03,3930.43 v1(777.01,3930.43) ; U1.83@723.03,4009.17 v1(777.01,4009.17) ; U1.46@723.03,4737.52 v1(777.01,4737.52) ; U1.45@723.03,4757.2 v1(777.01,4757.2) ; v5(729.92,5677.95) CON500.2@729.92,5758.96 ; U1.89@794.88,3838.9 v1(794.88,3892.87) ; v1(794.88,4775.08) U1.44@794.88,4829.06 ; U1.90@814.57,3838.9 v1(814.57,3892.87) ; v1(814.57,4775.08) U1.43@814.57,4829.06 ; v1(903.98,920.02) C215.1@903.98,963.43 ; v1(991.73,3784.92) U1.99@991.73,3838.9 ; U101.54@993.22,1820.71 v1(1039.41,1820.71) ; U101.52@993.22,1883.7 v1(1039.41,1883.7) ; U101.46@993.22,2072.68 v1(1039.41,2072.68) ; U101.41@993.22,2230.16 v1(1039.41,2230.16) ; U101.28@993.22,2639.61 v1(1039.41,2639.61) ; v1(1022,5435.27) U201.4@1081.18,5435.27 ; U204.15@1033.98,1158.62 1033.98,1249.43 C210.1@1041.44,1256.89 v1(1041.44,1300.29) ; C402.1@1165,637.4 v1(1165,687.18) ; U1.111@1227.95,3838.9 1227.95,3779.92 v1(1237.95,3769.92) ; U1.22@1227.95,4829.06 1227.95,4792.05 v1(1255,4765) ; C400.1@1235,633.46 v1(1235,683.25) ; v1(1285,85.22) D500.2@1285,140 ; C401.1@1295,633.46 v1(1295,683.25) ; C216.1@1327.44,846.89 v1(1370.84,846.89) ; v1(1335,3770) 1346.06,3781.06 U1.117@1346.06,3838.9 ; v1(1365,85.22) D501.2@1365,140 ; v1(1365,5278.84) U600.1@1365,5332.81 ; U1.15@1365.75,4829.06 v1(1365.75,4890) ; v1(1382.08,1978.19) U101.6@1428.26,1978.19 ; v1(1382.08,2167.17) U101.12@1428.26,2167.17 ; CON500.9@1429.92,5619 v5(1429.92,5700) ; v1(1445,85.22) D502.2@1445,140 ; v1(1585,4630) 1605,4610 1665,4610 1674.41,4619.41 U1.169@1713.19,4619.41 ; C654.1@1593.46,5322.81 v1(1635,5322.81) ; C652.1@1593.46,5382.81 v1(1635,5382.81) ; C653.1@1593.46,5442.81 v1(1635,5442.81) ; U1.131@1621.65,3838.9 v1(1621.65,3892.87) ; v1(1621.65,4775.08) U1.2@1621.65,4829.06 ; v1(1635,3955) 1669.49,3989.49 U1.137@1713.19,3989.49 ; U1.132@1641.34,3838.9 v1(1641.34,3892.87) ; v1(1641.34,4775.08) U1.1@1641.34,4829.06 ; v1(1650,4055) 1676.14,4028.86 U1.139@1713.19,4028.86 ; v1(1650,4240) 1664.29,4225.71 U1.149@1713.19,4225.71 ; v1(1659.21,3910.75) U1.133@1713.19,3910.75 ; v1(1659.21,3930.43) U1.134@1713.19,3930.43 ; v1(1659.21,4737.52) U1.175@1713.19,4737.52 ; v1(1659.21,4757.2) U1.176@1713.19,4757.2 ; U1.151@1713.19,4265.08 1757.17,4265.08 v1(1767.17,4275.08) ; U1.157@1713.19,4383.19 1763.7,4383.19 v1(1768.7,4388.19) ; U1.163@1713.19,4501.3 1761.3,4501.3 v1(1765,4505) ; v1(1734.21,3662.54) C101.1@1788.19,3662.54 ; v1(1734.21,3722.54) R148.1@1788.19,3722.54 ; C407.1@1780,1415 1780,1541.06 C406.1@1783.94,1545 ; v1(1783.94,1596.54) C406.1@1783.94,1545 ; C406.1@1785,1546.06 C406.1@1783.94,1545 ; C103.1@1898.29,3229.13 v1(1952.27,3229.13) ; v1(1918.46,1328.46) L402.1@1965,1328.46 ; v1(1965,1375) L402.1@1965,1328.46 ; v1(2011.54,1328.46) L402.1@1965,1328.46 ; v1(2025.42,3229.13) C102.1@2079.39,3229.13 ; v1(2076.89,2628.11) U500.19@2120.71,2628.11 ; v1@2092.8,3885.88 Y100.2@2144.65,3885.88 ; v1(2218.11,5313.11) L302.1@2218.11,5360.51 ; U401.11@2280.51,1404.41 2280.51,1369.57 v1(2302.21,1347.87) ; Y400.2@2288.11,1893.84 2288.11,1830.02 v1(2294.29,1823.84) ; v1(2390.39,4235.39) U301.47@2390.39,4296.34 ; v1(2405,3900) 2410.08,3905.08 U301.15@2410.08,3977.44 ; v1(2472.5,3908.5) 2488.82,3924.82 U301.19@2488.82,3977.44 ; v1(2577.36,4225.47) U301.35@2638.43,4225.47 ; U301.36@2638.43,4245.16 2679.8,4245.16 v1(2695,4260.35) ; Y300.2@2712.02,4478.11 v1(2772.16,4478.11) ; v1(2770,1300) 2789.62,1280.38 U203.25@2834.33,1280.38 ; v1(2780.35,1103.21) U203.34@2834.33,1103.21 ; C211.2@2932.49,557.11 v1(2975.89,557.11) ; U203.18@3003.62,1331.56 3003.62,1370.99 3032.63,1400 v1(3060,1400) ; v1(3030.11,5311.11) L301.1@3030.11,5358.51 ; U203.45@3042.99,1012.66 v1(3042.99,1072.64) ; v1(3050.16,557.11) C212.2@3093.56,557.11 ; U203.47@3082.36,1012.66 v1(3082.36,1072.64) ; U203.9@3153.23,1221.32 3227.2,1221.32 v1(3237.2,1231.32) ; C209.2@3404.49,1102.11 3409.49,1097.11 v1(3452.11,1097.11) ; v1(3480,1683.07) R243.1@3531.54,1683.07 ; v1(3503.11,1283.98) C203.1@3503.11,1325.51 ; v1(3519.13,1553.98) U202.1@3573.11,1553.98 ; v1(3568.11,1283.98) C201.1@3568.11,1325.51 ; v1(3573.11,2911.89) S501.1@3624.8,2911.89 ; v1(3573.11,2978.82) S501.2@3624.8,2978.82 ; U205.5@3584.06,484.51 3643.31,484.51 3651.77,476.05 v1(3722.97,476.05) ; v1(3628.11,1283.98) C202.1@3628.11,1325.51 ; D603.2@3650,5803.46 v1(3650,5865) ; S503.1@3680,2397.01 v1(3680,2463.7) ; v1(3680,2643.31) S503.1@3680,2710 ; CON200.6@3681.06,1809.06 v1(3729.33,1809.06) ; v1(3785.2,613.98) L201.2@3849.65,613.98 ; S502.1@4159,2396.01 v1(4159,2462.7) ; v1(4159,2642.31) S502.1@4159,2709 ; D200.2@4205.35,1392.44 v1(4266.89,1392.44)
  Top Layer w25: v2@318.11,5163.11 U601.3@318.11,5249.92
  Top Layer w40: U601.6@318.11,5486.14 v2(318.11,5563.11)
  Bottom Layer w10: v1(91.18,1870) R210.1@131.54,1870 ; v1(91.18,1930) R209.1@131.54,1930 ; v1(91.18,1990) R208.1@131.54,1990 ; v1(813.66,4027.44) C619.1@858.11,4027.44 ; v1(903.66,4640.51) C639.1@948.11,4640.51 ; C641.1@918.11,4027.44 C626.1@978.11,4027.44 978.11,4048.78 v1(1001.22,4071.89) ; C636.1@926.57,4093.98 v1(979.96,4093.98) ; C618.1@926.57,4153.98 v1(979.96,4153.98) ; C630.1@926.57,4453.98 v1(979.96,4453.98) ; C617.1@926.57,4513.98 v1(979.96,4513.98) ; C603.1@926.57,4573.98 v1(979.96,4573.98) ; C600.1@930.51,4223.98 v1(979.96,4223.98) ; C616.1@930.51,4303.98 v1(979.96,4303.98) ; C615.1@930.51,4383.98 v1(979.96,4383.98) ; C200.1@936.18,5393.73 v1(936.18,5433.16) ; v1(1008.11,4587.13) C633.1@1008.11,4640.51 ; C635.1@1038.11,4027.44 v1(1038.11,4071.89) ; v1(1068.11,4587.13) C634.1@1068.11,4640.51 ; C620.1@1098.11,4027.44 v1(1098.11,4071.89) ; v1(1138.11,4587.13) C601.1@1138.11,4636.57 ; v1(1140.16,1820.71) C105.1@1180.51,1820.71 ; v1(1140.16,1883.7) C106.1@1180.51,1883.7 ; v1(1140.16,2072.68) C109.1@1180.51,2072.68 ; v1(1140.16,2230.16) C110.1@1180.51,2230.16 ; v1(1140.16,2639.61) C111.1@1180.51,2639.61 ; C640.1@1158.11,4027.44 v1(1158.11,4071.89) ; C624.1@1218.11,4027.44 v1(1218.11,4071.89) ; v1(1218.11,4587.13) C625.1@1218.11,4636.57 ; C108.1@1247.44,1978.19 v1(1287.8,1978.19) ; C107.1@1247.44,2167.17 v1(1287.8,2167.17) ; C621.1@1278.11,4027.44 v1(1278.11,4071.89) ; v1(1298.11,4587.13) C637.1@1298.11,4636.57 ; C627.1@1338.11,4027.44 v1(1338.11,4071.89) ; v1(1368.11,4587.13) C631.1@1368.11,4640.51 ; C623.1@1398.11,4027.44 v1(1398.11,4071.89) ; v1(1428.11,4587.13) C638.1@1428.11,4640.51 ; v1(1435,4071.89) 1458.11,4048.78 C622.1@1458.11,4027.44 C604.1@1518.11,4027.44 ; v1(1465.2,4093.98) C606.1@1509.65,4093.98 ; v1(1465.2,4153.98) C629.1@1509.65,4153.98 ; v1(1465.2,4213.98) C607.1@1509.65,4213.98 ; v1(1465.2,4273.98) C608.1@1509.65,4273.98 ; v1(1465.2,4333.98) C632.1@1509.65,4333.98 ; v1(1465.2,4393.98) C609.1@1509.65,4393.98 ; v1(1465.2,4453.98) C610.1@1509.65,4453.98 ; v1(1465.2,4513.98) C628.1@1509.65,4513.98 ; v1(1465.2,4573.98) C611.1@1509.65,4573.98 ; C602.1@1488.11,4640.51 v1(1532.56,4640.51) ; C605.1@1578.11,4027.44 1597.44,4027.44 v1(1625,4055) ; C100.1@2059.65,3821.08 v1(2059.65,3860.73) ; C301.1@2223.11,4235.51 2289.57,4235.51 C300.1@2293.66,4231.42 2297.64,4235.39 v1(2390.39,4235.39) ; v1(2260,4085) 2301.54,4043.46 C307.1@2301.54,4029.13 ; v1(2294.29,1823.84) 2304.29,1813.84 C414.1@2354.65,1813.84 ; v1(2358.11,5195.09) C312.2@2358.11,5234.51 ; 2442,3852 v1(2475,3885) ; C303.1@2478.98,4170.35 v1(2478.98,4213.78) ; C304.1@2538.98,4170.35 v1(2538.98,4213.78) ; v1(2622,3693.94) R306.1@2622,3761.54 ; v1(2675.59,4296.34) C308.1@2675.59,4350 ; C311.2@2680,5430 v1(2719.43,5430) ; v1(2695,4260.35) 2748.11,4260.35 C302.1@2750,4258.46 ; C310.1@2713.46,4975 v1(2752.89,4975) ; v1(2740.92,3986.54) C306.1@2740.92,4029.13 ; C305.2@2787.42,3940 v1(2850.02,3940) ; v1(2797.02,4505.22) C313.1@2797.02,4544.65 ; v1(2950.02,787.21) C207.1@2950.02,834.65 ; v1(3010.02,787.21) C206.1@3010.02,834.65 ; v1(3070.02,787.21) C208.1@3070.02,834.65 ; C205.1@3404.49,1027.11 3442.11,1027.11 v1(3450,1035) ; C204.1@3408.43,1097.11 v1(3452.11,1097.11) ; v1(3729.33,1809.06) 3780.16,1809.06 C218.1@3790,1818.9
  other v1: 2087.8,3885.88
  other v2: 3815,3385 3910,3425 3885,3697.4 3950,3697.4 4015,3697.4 4080,3697.4 3925,4120 3820,4395 3945,4545 3890,4705 3955,4705 4020,4705 4085,4705 3925,5130 318.11,5168.11
  other v3: 2146.3,2689.21 2193.54,2689.21 2146.3,2736.46 2193.54,2736.46 1123.62,4239.49 1170.87,4239.49 1218.11,4239.49 1265.35,4239.49 1312.6,4239.49 1123.62,4286.73 1170.87,4286.73 1218.11,4286.73 1265.35,4286.73 1312.6,4286.73 1123.62,4333.98 1170.87,4333.98 1218.11,4333.98 1265.35,4333.98 1312.6,4333.98 1123.62,4381.22 1170.87,4381.22 1218.11,4381.22 1265.35,4381.22 1312.6,4381.22 1123.62,4428.46 1170.87,4428.46 1218.11,4428.46 1265.35,4428.46 1312.6,4428.46
K\E\Y\P\A\D\_\I\N\T\: R239.2 R505.2 U1.154 | length 2798
  Top Layer w10: U1.154@1713.19,4324.13 1800.87,4324.13 v1(1810,4315) ; v1(2300,2420) R505.2@2300,2466.54 R239.2@2360,2466.54
  Bottom Layer w10: v1(1810,4315) 1836.16,4315 1950,4201.16 1950,4095.71 1860,4005.71 1860,3690 2050,3500 2050,3190 1910,3050 1910,2440.12 2015.12,2335 2215,2335 v1(2300,2420)
LDQM: R138.2 U101.15 | length 1683.7
  Top Layer w10: R138.2@1338.11,3448.39 1338.11,3319.33 1567.44,3090 v1(1755,3090) ; U101.15@1428.26,2261.65 1498.18,2261.65 1584.37,2347.84 v1(1592.95,2347.84)
  Bottom Layer w10: v1(1592.95,2347.84) 1649.37,2347.84 1755,2453.47 v1(1755,3090)
MDC: U1.4 U301.31 | length 2876.8
  Top Layer w10: U1.4@1582.28,4829.06 1582.28,4887.28 v1(1625,4930) ; v1(1625,5210.56) 2009.07,5210.56 2479.63,4740 2915,4740 2945,4710 2945,4335 2913.75,4303.75 2913.75,4093.75 2885,4065 2845,4065 2763.27,4146.73 U301.31@2638.43,4146.73
  Bottom Layer w10: v1(1625,4930) v1(1625,5210.56)
MDIO: U1.3 U301.30 | length 2954.1
  Top Layer w10: U1.3@1601.97,4829.06 1601.97,4871.97 v1(1660,4930) ; v1(1660,5240) 2021.27,5240 2501.27,4760 2925,4760 2970,4715 2970,4310 2933.75,4273.75 2933.75,4083.75 2895,4045 2835,4045 2752.95,4127.05 U301.30@2638.43,4127.05
  Bottom Layer w10: v1(1660,4930) v1(1660,5240)
NetC101_2: C101.2 R144.1 R148.2 U1.135 | length 387.3
  Top Layer w10: U1.135@1713.19,3950.12 1783.15,3950.12 1855.12,3878.15 C101.2@1855.12,3662.54
NetC102_2: C102.2 R146.1 U1.141 X100.1 | length 1120.9
  Top Layer w10: U1.141@1713.19,4068.23 1777.95,4068.23 1920,3926.18 1920,3650.36 2001.38,3568.98 2001.38,3535.78 2022.31,3514.85 R146.1@2022.31,3489.13 2123.02,3489.13 2151.38,3460.78 X100.1@2151.38,3355.78 ; C102.2@2146.32,3229.13 X100.1@2146.32,3359.13
NetC103_2: C103.2 R146.2 U1.140 X100.2 | length 1073.4
  Top Layer w10: U1.140@1713.19,4048.54 1762.28,4048.54 1895,3915.83 1895,3640 1976.38,3558.62 1976.38,3535.78 1955.38,3514.78 ; C103.2@1831.36,3229.13 1831.36,3460.76 1859.73,3489.13 R146.2@1955.38,3489.13 1955.38,3514.85
NetC209_1: C209.1 U203.6 | length 209.2
  Top Layer w10: U203.6@3153.23,1162.27 3237.73,1162.27 3297.89,1102.11 C209.1@3337.56,1102.11
NetC211_1: C211.1 U203.43 X200.2 | length 530
  Top Layer w10: C211.1@2865.56,557.11 2844.7,577.97 2844.7,719.7 3003.62,878.62 U203.43@3003.62,1012.66
NetC212_1: C212.1 U203.44 X200.1 | length 528
  Top Layer w10: U203.44@3023.31,1012.66 3023.31,876.69 3179.35,720.65 3179.35,575.97 C212.1@3160.49,557.11
NetC213_1: C213.1 U204.3 | length 133.7
  Top Layer w10: C213.1@1057.44,846.89 1057.44,877.44 1083.98,903.98 U204.3@1083.98,969.65
NetC213_2: C213.2 U204.1 | length 125.5
  Top Layer w10: U204.1@983.98,969.65 983.98,853.43 C213.2@990.51,846.89
NetC214_1: C214.1 U204.5 | length 126.3
  Top Layer w10: U204.5@1183.98,969.65 1183.98,855.35 C214.1@1192.44,846.89
NetC214_2: C214.2 U204.4 | length 126.3
  Top Layer w10: C214.2@1125.51,846.89 1133.98,855.35 U204.4@1133.98,969.65
NetC215_2: C215.2 U204.2 | length 182.3
  Top Layer w10: C215.2@903.98,1030.35 1019.65,1030.35 1033.98,1016.02 U204.2@1033.98,969.65
NetC216_2: C216.2 U204.6 | length 133.7
  Top Layer w10: U204.6@1233.98,969.65 1233.98,900.1 1260.51,873.56 C216.2@1260.51,846.89
NetC411_1: C411.1 R401.2 | length 68.1
  Top Layer w10: R401.2@1955,918.46 C411.1@1955,986.54
NetC411_2: C411.2 U401.1 | length 186.5
  Top Layer w10: C411.2@1955,1053.46 1955,1085 1980,1110 2015,1110 2050.2,1145.2 U401.1@2050.2,1180
NetC412_1: C412.1 R402.2 | length 68.1
  Top Layer w10: R402.2@2015,918.46 C412.1@2015,986.54
NetC412_2: C412.2 U401.2 | length 151.7
  Top Layer w10: C412.2@2015,1053.46 2015,1085 2075.79,1145.79 U401.2@2075.79,1180
NetC413_2: C413.2 R403.1 U400.2 | length 190.1
  Top Layer w10: U400.2@1935,630 2007.81,630 2016.28,621.54 R403.1@2050,621.54 2053.94,617.6 C413.2@2120,617.6
NetC417_2: C417.2 U401.8 | length 137.2
  Top Layer w10: U401.8@2229.33,1180 2229.33,1135.67 2255,1110 C417.2@2255,1053.46
NetC418_1: C418.1 CON401.3 R416.2 | length 418.5
  Top Layer w10: R416.2@2633.52,529.15 C418.1@2573.52,529.15 2573.52,261.48 2599.69,235.31 CON401.3@2653.54,235.31
NetC418_2: C418.2 R417.1 | length 68.1
  Top Layer w10: C418.2@2573.52,596.08 R417.1@2573.52,664.15
NetC419_1: C419.1 U402.9 | length 251.7
  Top Layer w10: C419.1@2135,842.6 2135,795 2181.79,748.21 U402.9@2319.69,748.21
NetC419_2: C419.2 R413.1 R418.1 | length 129.1
  Top Layer w10: C419.2@2135,917.4 R418.1@2135,986.54 R413.1@2195,986.54
NetC420_1: C420.1 U402.4 | length 323.9
  Top Layer w10: C420.1@2475,572.6 2522.6,572.6 2541.85,591.85 2541.85,768.15 2522.42,787.58 U402.4@2477.17,787.58
NetC420_2: C420.2 U402.2 | length 186.5
  Top Layer w10: C420.2@2475,647.4 2512.4,647.4 2525,660 2525,740 2516.79,748.21 U402.2@2477.17,748.21
NetC421_2: C421.2 R417.2 U402.5 | length 220.4
  Top Layer w10: U402.5@2477.17,807.26 2552.74,807.26 2573.52,786.48 R417.2@2573.52,731.08 C421.2@2633.52,731.08
NetC422_1: C422.1 U402.6 | length 149.2
  Top Layer w10: U402.6@2319.69,807.26 2373.35,807.26 2407.76,841.68 C422.1@2407.76,888.52
NetC423_2: C423.2 R418.2 U401.5 | length 193.8
  Top Layer w10: C423.2@2075,1053.46 R418.2@2135,1053.46 2135,1105 2152.56,1122.56 U401.5@2152.56,1180
NetC642_1: C642.1 U602.1
NetC642_2: C642.2 D600.2 L600.1 U602.8
NetC645_1: C645.1 C646.2 L600.2 R605.1 R606.2
NetC647_1: C647.1 U603.1 | length 170.9
  Top Layer w10: C647.1@3678.11,5091.57 3678.11,5016.89 3698.11,4996.89 U603.1@3698.11,4928.98
NetC647_2: C647.2 D602.2 L601.1 U603.8
NetC650_1: C650.1 C651.2 L601.2 R608.1 R609.2
NetCON200_2: CON200.2 R245.1 | length 85.8
  Top Layer w10: R245.1@3598.46,1990 3635,1990 3642.72,1982.28 CON200.2@3681.06,1982.28
NetCON200_3: CON200.3 R242.2 | length 88.4
  Top Layer w10: R242.2@3598.46,1925 3630,1925 3643.98,1938.98 CON200.3@3681.06,1938.98
NetCON200_5: CON200.5 R240.2 | length 82.6
  Top Layer w10: R240.2@3598.46,1852.36 CON200.5@3681.06,1852.36
NetCON200_7: CON200.7 R241.2 | length 82.6
  Top Layer w10: R241.2@3598.46,1765.75 CON200.7@3681.06,1765.75
NetCON200_9: CON200.9 R243.2 | length 82.6
  Top Layer w10: R243.2@3598.46,1683.07 CON200.9@3681.06,1683.07
NetCON200_10: CON200.10 R244.1 | length 87.5
  Top Layer w10: R244.1@3994.06,1570 CON200.10@3994.06,1657.48
NetCON201_1: CON201.1 L200.1 | length 338
  Top Layer w10: L200.1@3688.11,1325.51 3688.11,1241.89 3800.39,1129.61 CON201.1@3800.39,1033.98
NetCON202_1: CON202.1 U204.13 | length 1464.6
  Top Layer w10: CON202.1@383,2270 455,2270 470,2255 470,1970 1133.98,1306.02 U204.13@1133.98,1158.62
NetCON202_2: CON202.2 U204.14 | length 1744.5
  Top Layer w10: CON202.2@215.68,2270 145,2270 130,2255 130,2225 145,2210 420,2210 445,2185 445,1959.29 1083.98,1320.31 U204.14@1083.98,1158.62
NetCON300_9: CON300.9 U301.28 | length 1889
  Top Layer w10: U301.28@2638.43,4087.68 2732.32,4087.68 2815,4005 2945,4005 2973,4033 v1(2975,4035)
  Bottom Layer w10: CON300.9@2409.49,5051.27 2409.49,4975.51 2515,4870 2880,4870 3025,4725 3025,4085 v1(2975,4035)
NetCON300_10: CON300.10 R322.1 | length 88.7
  Bottom Layer w10: CON300.10@2509.49,5051.27 R322.1@2509.49,5140
NetCON300_11: CON300.11 U301.27 | length 1588
  Top Layer w10: U301.27@2638.43,4067.99 2722.01,4067.99 2805,3985 2960,3985 v1(2975,4000)
  Bottom Layer w10: CON300.11@2739.8,5051.27 3050,4741.07 3050,4075 v1(2975,4000)
NetCON300_12: CON300.12 R321.1 | length 84.2
  Bottom Layer w10: CON300.12@2839.8,5051.27 R321.1@2839.8,5135.51
NetCON400_2: CON400.2 U400.8 | length 194.4
  Top Layer w10: CON400.2@1677.17,443.98 1677.17,562.17 1695,580 U400.8@1746.02,580
NetCON400_4: CON400.4 S400.1 | length 1404.3
  Top Layer w10: S400.1@392.99,198.98 556.97,35 1470.36,35 1627.36,192.01 CON400.4@1664.37,192.01